# Allegro board standard2.brd
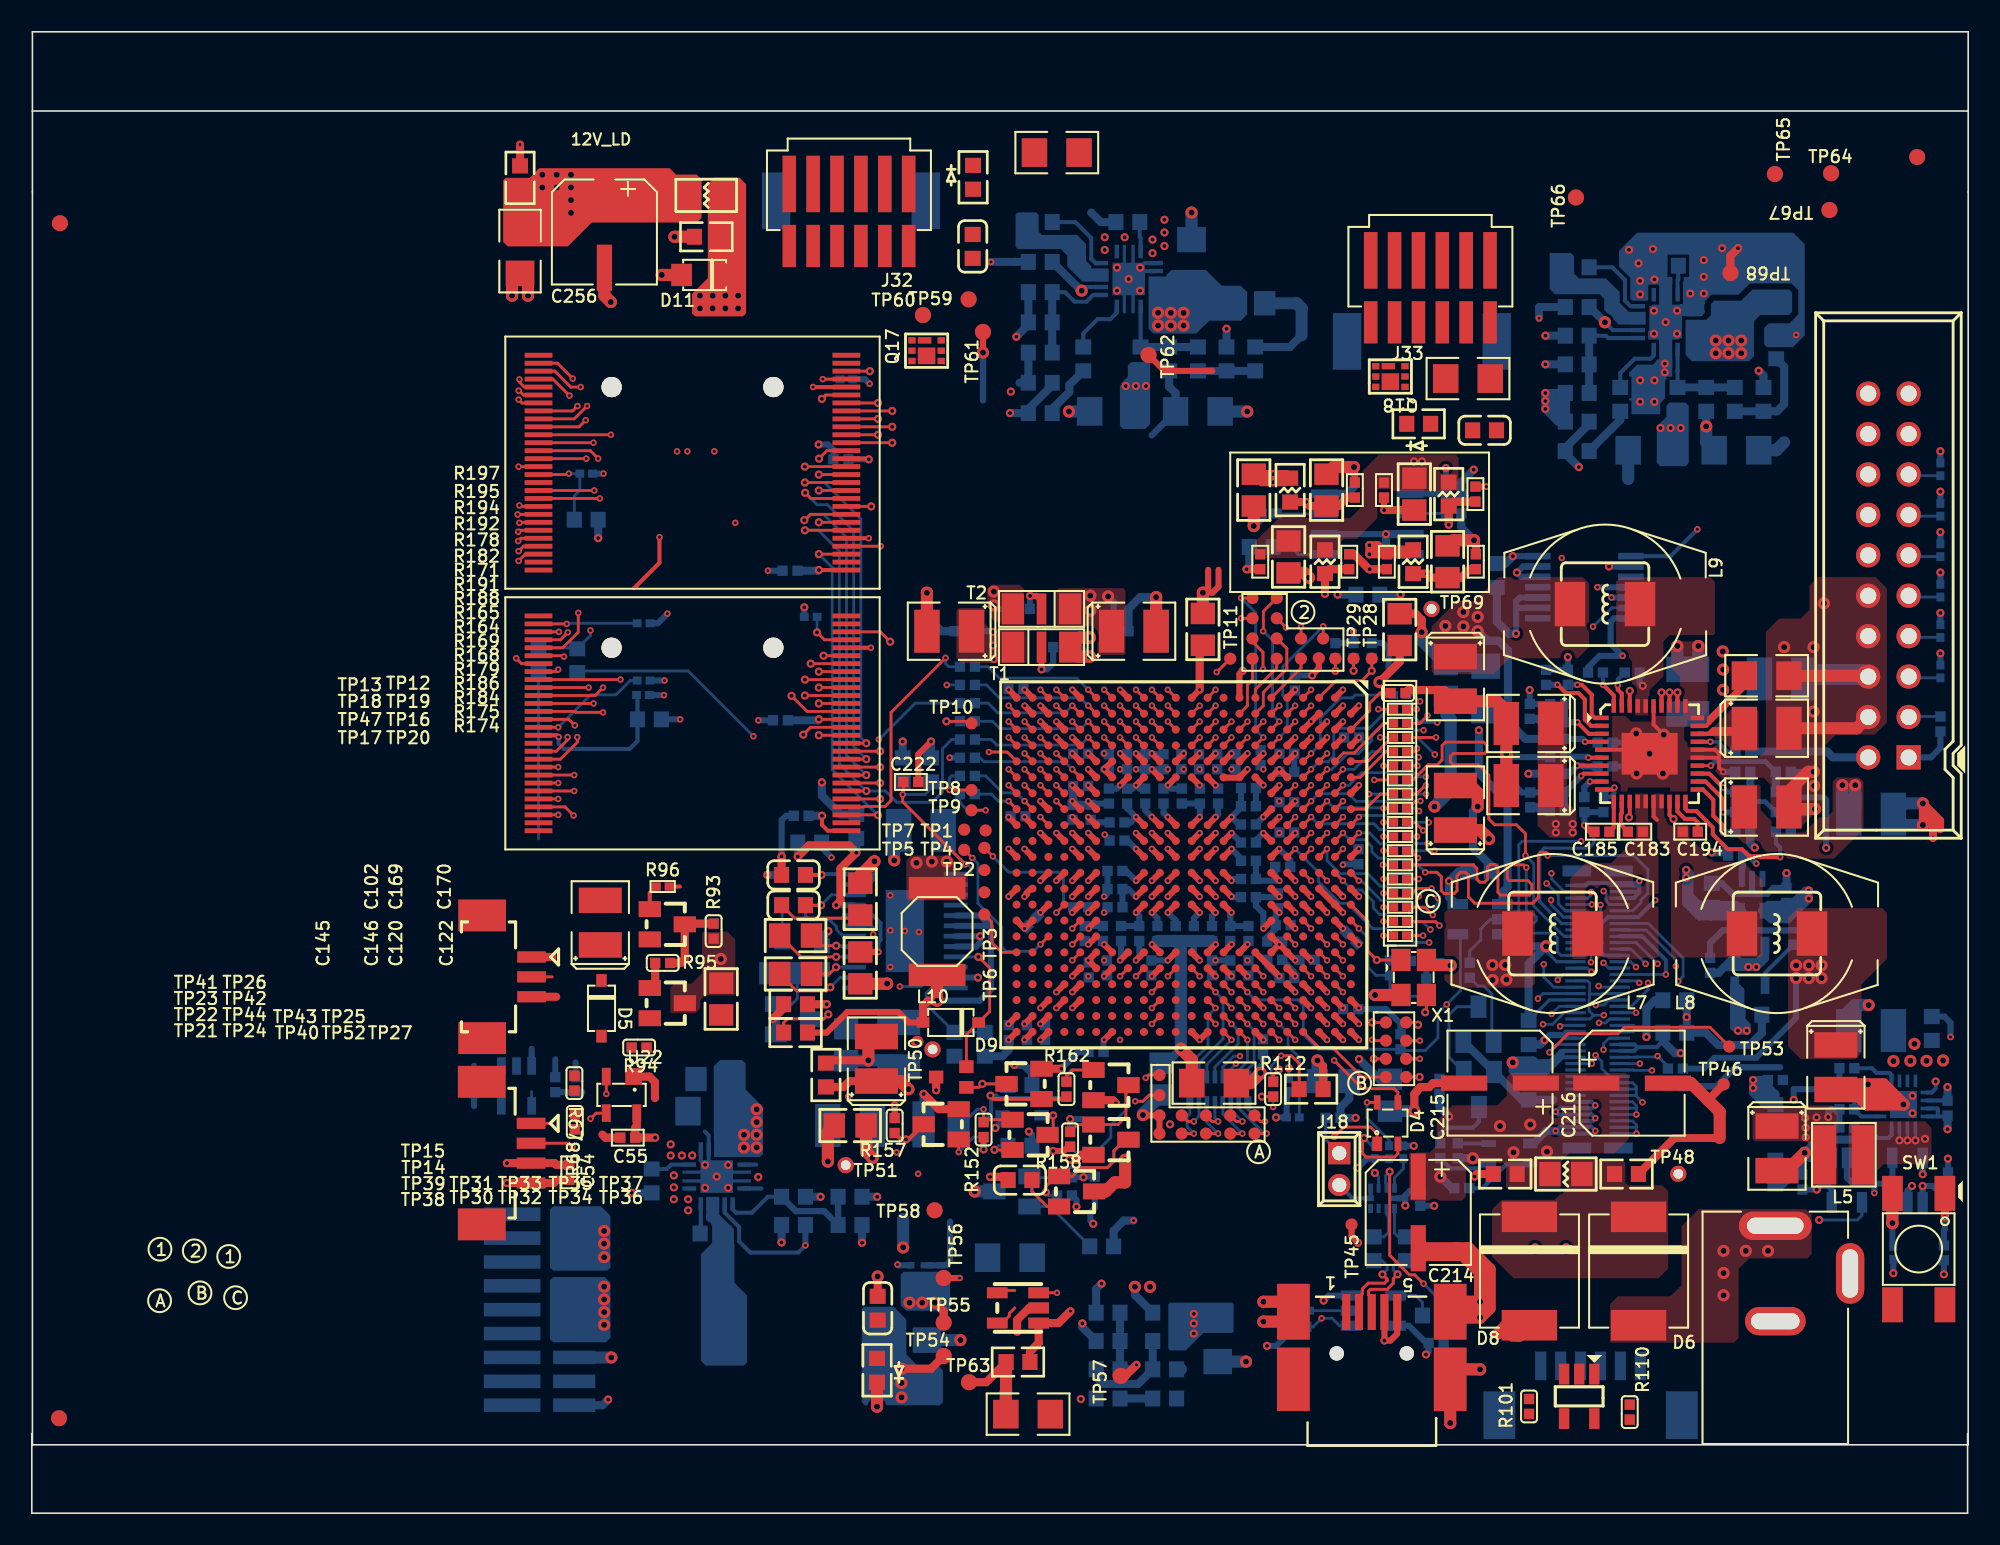
[diagram p0: board, top side]
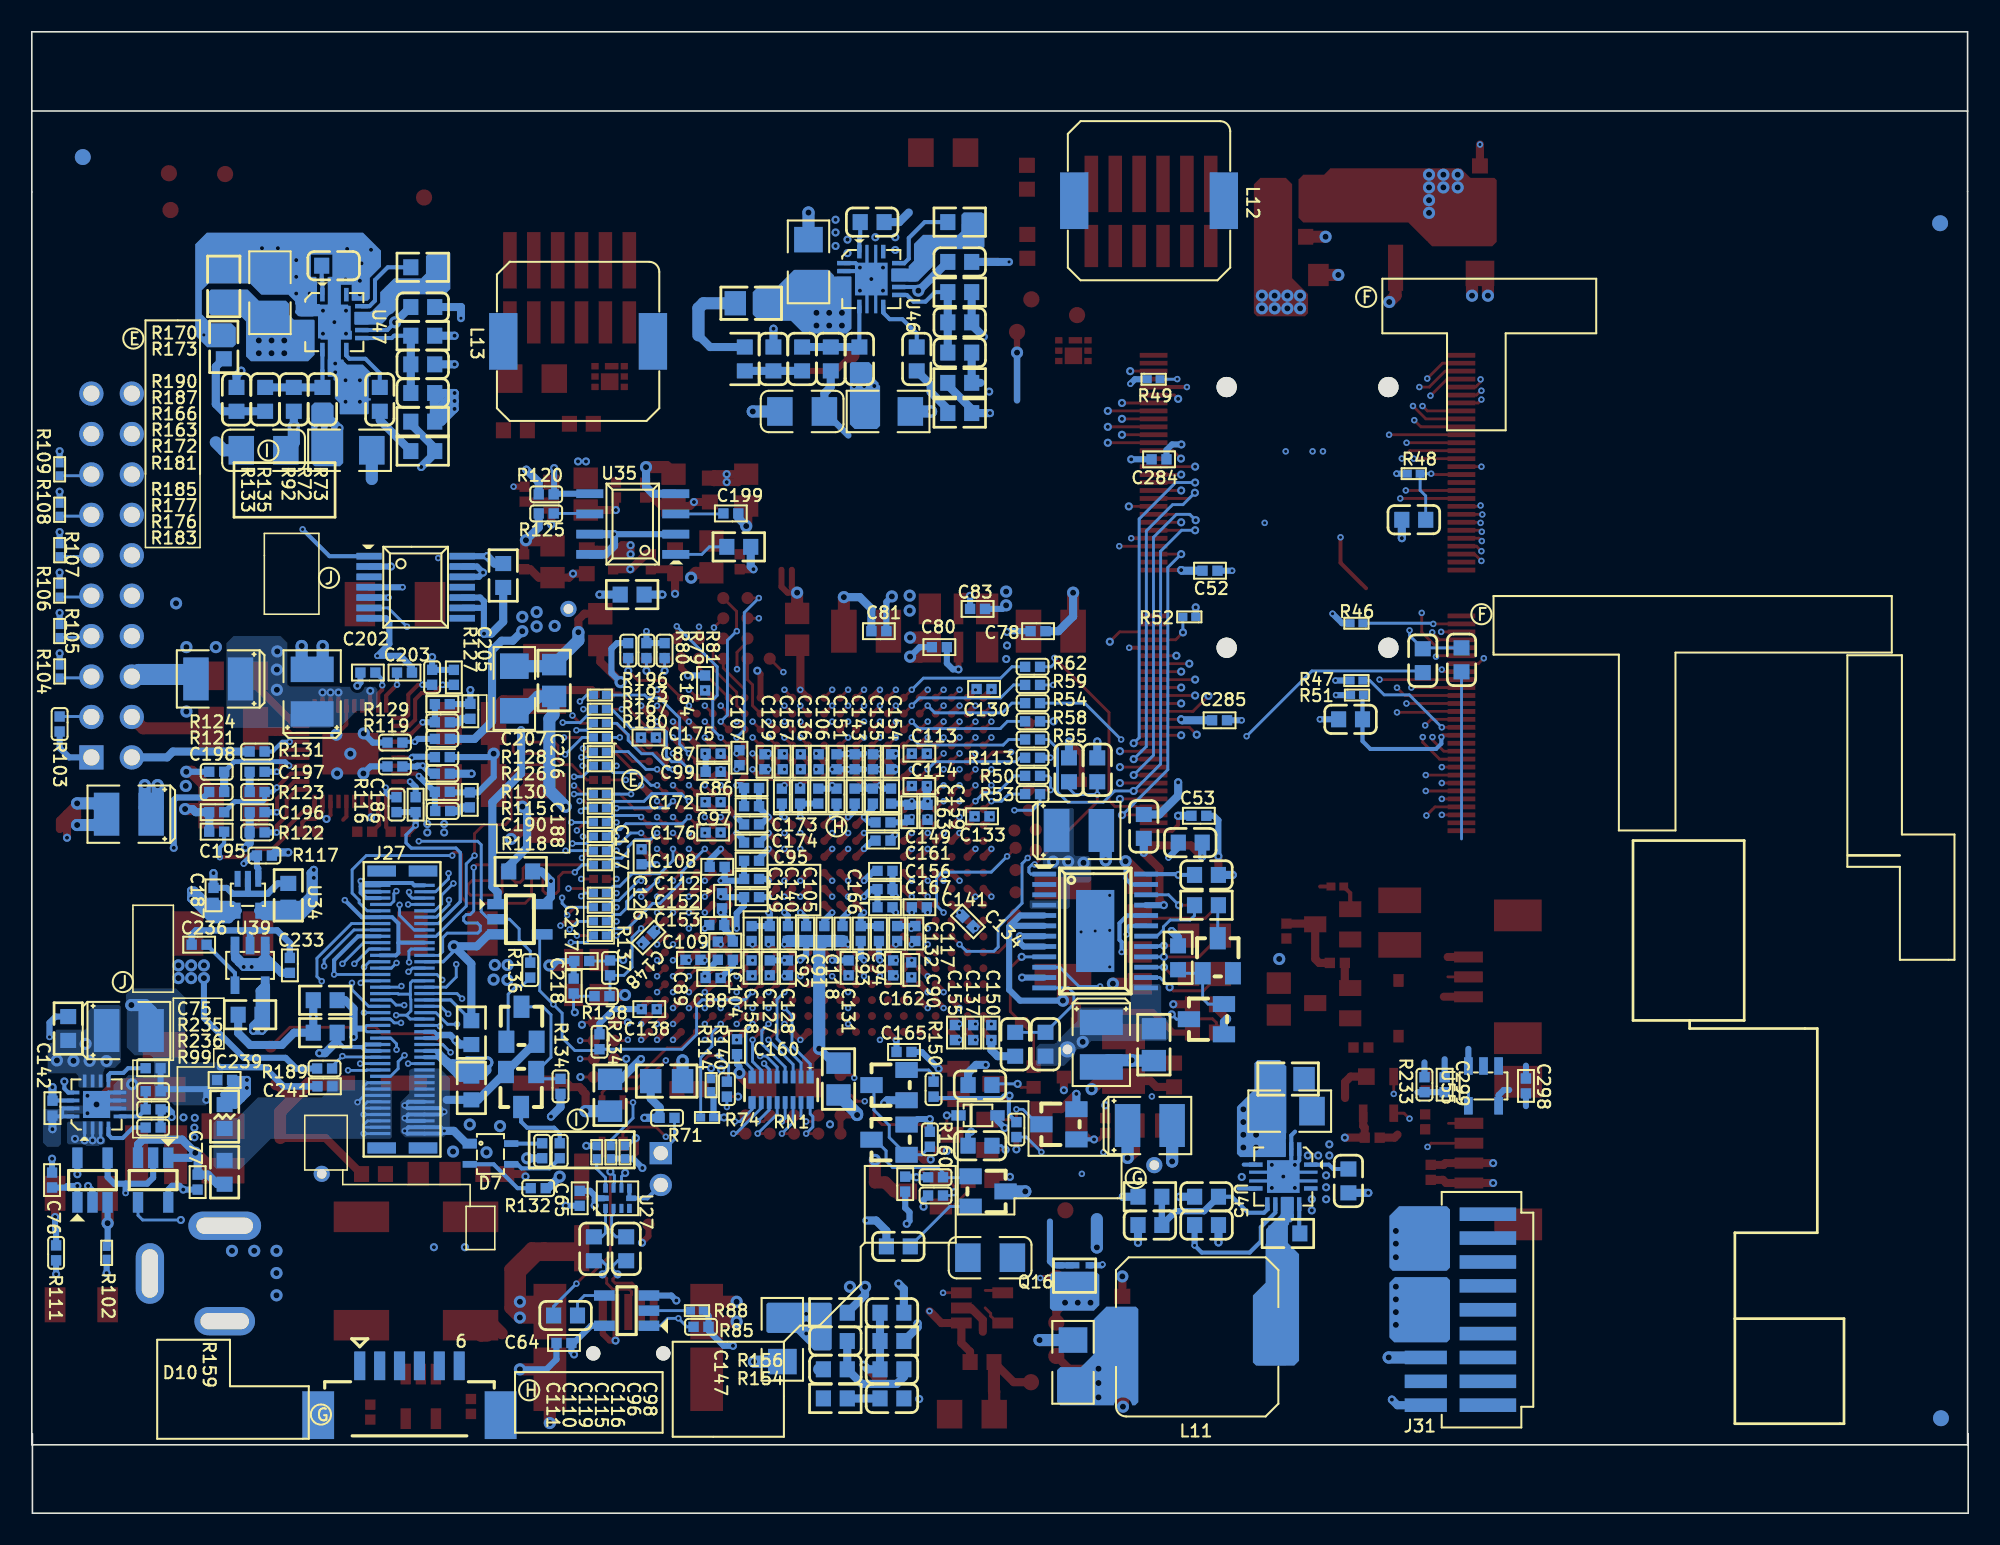
[diagram p1: board, bottom side, seen from below]

Outline 121.64 x 93.09 mm; copper layers: TOP, 2-GND, 3-SIG, 4--SIG, 5-VCC, 6-SIG, 7-VCC, BOTTOM. Coordinates in mm from the lower left corner of the outline.
Outline path: 0,5 0,0 121.6,0 121.6,5 ; 0.04,88.09 0.04,93.09 121.64,93.09 121.64,88.09

## Design rules (mm)
net group DIFF: nets USB_DAT_N USB_DAT_P
net group DIFFPAIR0: nets USB_DAT_NS USB_DAT_PS
net group DIFFPAIR2: nets RX_DATA0N RX_DATA0P
net group DIFFPAIR4: nets RX_DATA2N RX_DATA2P
net group DIFFPAIR5: nets DAT_N DAT_P
net group DIFFPAIR6: nets SYS_USB_DN SYS_USB_DP
net group P1_: nets P1_FIELD P2_CLK
net group 20: nets P3_CLK XTAL_IN XTAL_OUT
net group A2: nets A2 DVR0 P1_A2
net group A3: nets A3 DVR1 P1_A3
net group A4: nets A4 DVR2 P1_A4
net group A5: nets A5 DVR3 P1_A5
net group A6: nets A6 DVR4 P1_A6
net group A7: nets A7 DVR5 P1_A7
net group A8: nets A8 DVR6 P1_A8
net group A9: nets A9 DVR7 P1_A9
net group B2: nets B2 DVG0 P1_B2
net group B3: nets B3 DVG1 P1_B3
net group B4: nets B4 DVG2 P1_B4
net group B5: nets B5 DVG3 P1_B5
net group B6: nets B6 DVG4 P1_B6
net group B7: nets B7 DVG5 P1_B7
net group B8: nets B8 DVG6 P1_B8
net group B9: nets B9 DVG7 P1_B9
net group C2: nets C2 DVB0 P1_C2
net group C3: nets C3 DVB1 P1_C3
net group C4: nets C4 DVB2 P1_C4
net group C5: nets C5 DVB3 P1_C5
net group C6: nets C6 DVB4 P1_C6
net group C7: nets C7 DVB5 P1_C7
net group C8: nets C8 DVB6 P1_C8
net group C9: nets C9 DVB7 P1_C9
net group CLK: nets SSP0_CLK
net group D: nets DMD_D00 DMD_D01 DMD_D03 DMD_D04 DMD_D05 DMD_D07 DMD_D08 DMD_D11 DMD_D12 DMD_D13 DMD_D15 DMD_D16 DMD_D17 DMD_D20 DMD_D21 DMD_D22 DMD_D23 DMD_DAD_BUS DMD_DAD_OEZ DMD_DAD_STRB DMD_LOADB DMD_SAC_BUS DMD_SAC_CLK DMD_SCTRL DMD_TRC
net group DMD: nets D_D02 D_D06 D_D09 D_D10 D_D14 D_D18 D_D19 D_DCLK
net group DMD_D00: nets D_D00
net group DMD_D01: nets D_D01
net group DMD_D02: nets DMD_D02
net group DMD_D03: nets D_D03
net group DMD_D04: nets D_D04
net group DMD_D05: nets D_D05
net group DMD_D06: nets DMD_D06
net group DMD_D07: nets D_D07
net group DMD_D08: nets D_D08
net group DMD_D09: nets DMD_D09
net group DMD_D10: nets DMD_D10
net group DMD_D11: nets D_D11
net group DMD_D12: nets D_D12
net group DMD_D13: nets D_D13
net group DMD_D14: nets DMD_D14
net group DMD_D15: nets D_D15
net group DMD_D16: nets D_D16
net group DMD_D17: nets D_D17
net group DMD_D18: nets DMD_D18
net group DMD_D19: nets DMD_D19
net group DMD_D20: nets D_D20
net group DMD_D21: nets D_D21
net group DMD_D22: nets D_D22
net group DMD_D23: nets D_D23
net group DMD_DAD_BUS: nets D_BUS
net group DMD_DAD_OEZ: nets D_OEZ
net group DMD_DAD_STRB: nets D_STRB
net group DMD_DCLK: nets DMD_DCLK
net group DMD_LOADB: nets D_LOADB
net group DMD_SAC_BUS: nets D_SACBUS
net group DMD_SAC_CLK: nets D_SACCLK
net group DMD_SCTRL: nets D_SCTRL
net group DMD_TRC: nets D_TRC
net group DVCLK: nets DVCLK MOC MUX_PCLK
net group DVDE: nets DVDE MDE MUX_DATAEN
net group DVHS: nets DVHS MHS MUX_HSYNC
net group DVVS: nets DVVS MUX_VSYNC MVS
net group PM_: nets PM_BLS0 PM_BLS0S PM_BLS1 PM_BLS1S PM_OEZ PM_SRAM_CSSZ PM_SRAM_CSZ PM_WEZ
net group PWR_PH: nets A1P8V_PLLD A1P8V_PLLM EXT_1V8 P1P2V_PLLD P1P2V_PLLM P1P8V_LED P1P8V_TIN P1P8V_TOUT P2P5V
net group SYS-M: nets SYS_DATA00 SYS_DATA01 SYS_DATA02 SYS_DATA03 SYS_DATA04 SYS_DATA05 SYS_DATA06 SYS_DATA07 SYS_DATA08 SYS_DATA09 SYS_DATA10 SYS_DATA11 SYS_DATA12 SYS_DATA13 SYS_DATA14 SYS_DATA15 SYS_DATA16 SYS_DATA17 SYS_DATA18 SYS_DATA19 SYS_DATA20 SYS_DATA21 SYS_DATA22 SYS_DATA23 SYS_DATA_EN SYS_HSYNC SYS_PCLK SYS_VSYNC
net group TRACEPT: nets TRACEPKT0 TRACEPKT1 TRACEPKT2 TRACEPKT3 TRACEPKT6 TRACEPKT7

## Placement (name value [footprint] x y rotation side)
C52  0.1 uF  [CAP_0402]  47.63 59.22 0 bottom
C53  0.1 uF  [CAP_0402]  48.33 43.82 0 bottom
C54  0.1 uF  [CAP_0402]  33.76 21.42 90 top
C55  0.1 uF  [CAP_0402]  37.44 23.6 0 top
C64  0.1 uF  [CAP_0402]  88.21 10.69 180 bottom
C65  0.1uF  [CAP_0402]  87.22 19.79 270 bottom
C66  1 uF  [CAP_0805]  43.3 32.31 90 top
C67  22 uF  [CAP_1210]  35.71 37.11 270 top
C70  10 uF  [CAP_1210]  115.54 30.33 180 bottom
C71  22 uF  [CAP_1210]  109.63 22.92 90 top
C74  0.1 uF  [CAP_0603]  119.35 30.46 270 bottom
C75  3.3 nF  [CAP_0402]  114.02 27.96 0 bottom
C76  0.1 uF  [CAP_0402]  120.37 20.93 90 bottom
C77  0.1 uF  [CAP_0402]  111.22 20.8 270 bottom
C78  0.1 uF  [CAP_0402]  58.43 55.42 180 bottom
C79  22 uF  [CAP_1210]  57.63 55.42 0 top
C80  10 nF  [CAP_0402]  64.63 54.42 180 bottom
C81  0.1 uF  [CAP_0402]  68.43 55.42 0 bottom
C82  22 uF  [CAP_1210]  69.23 55.42 180 top
C83  10 nF  [CAP_0402]  62.23 56.82 0 bottom
C84  10 uF  [CAP_0805]  85.32 26.26 270 bottom
C85  10 uF  [CAP_0805]  70.96 27.28 270 bottom
C86  0.1 uF  [CAP_0402]  76.43 45.57 180 bottom
C87  0.1 uF  [CAP_0402]  78.84 47.73 0 bottom
C88  0.1 uF  [CAP_0402]  78.84 33.63 0 bottom
C89  0.1 uF  [CAP_0402]  80.11 34.77 0 bottom
C90  0.1 uF  [CAP_0402]  66.39 34.14 270 bottom
C91  0.1 uF  [CAP_0402]  71.85 36.42 90 bottom
C92  0.1 uF  [CAP_0402]  73 36.42 90 bottom
C93  0.1 uF  [CAP_0402]  69.57 36.42 90 bottom
C94  0.1 uF  [CAP_0402]  68.42 36.42 90 bottom
C95  0.1 uF  [CAP_0402]  76.43 41 180 bottom
C96  0.1 uF  [CAP_0402]  68.81 45.06 270 bottom
C97  0.1 uF  [CAP_0402]  76.43 44.43 180 bottom
C98  0.1 uF  [CAP_0402]  67.66 45.06 270 bottom
C99  0.1 uF  [CAP_0402]  78.84 46.58 0 bottom
C100  10 uF  [CAP_0805]  76.76 64.29 270 top
C101  10 uF  [CAP_0805]  81.33 64.29 90 top
C102  0.001 uF  [CAP_0402]  83.11 64.29 270 top
C103  100 uF  [CAP_1206]  74.27 27.03 0 top
C104  0.1 uF  [CAP_0402]  78.08 34.77 0 bottom
C105  0.1 uF  [CAP_0402]  74.14 36.42 90 bottom
C106  0.1 uF  [CAP_0402]  72.21 47.22 270 bottom
C107  0.1 uF  [CAP_0402]  77.19 47.47 270 bottom
C108  0.1 uF  [CAP_0402]  78.58 40.62 0 bottom
C109  0.1 uF  [CAP_0402]  78.08 35.92 180 bottom
C110  0.1 uF  [CAP_0402]  73.38 45.06 270 bottom
C111  0.1 uF  [CAP_0402]  74.52 45.06 270 bottom
C112  0.1 uF  [CAP_0402]  76.43 39.85 180 bottom
C113  0.1 uF  [CAP_0402]  65.88 47.73 180 bottom
C114  0.1 uF  [CAP_0402]  65.88 45.7 180 bottom
C115  0.1 uF  [CAP_0402]  71.09 45.06 270 bottom
C116  0.1 uF  [CAP_0402]  69.95 45.06 270 bottom
C117  0.1 uF  [CAP_0402]  66.14 36.42 90 bottom
C118  0.1 uF  [CAP_0402]  70.71 36.42 90 bottom
C119  0.1 uF  [CAP_0402]  72.23 45.06 270 bottom
C120  0.1 uF  [CAP_0402]  85.12 59.79 270 top
C121  10 uF  [CAP_0805]  88.93 59.79 90 top
C122  0.001 uF  [CAP_0402]  90.71 59.79 270 top
C123  10 uF  [CAP_0805]  81.76 27.15 180 bottom
C124  10 uF  [CAP_0805]  85.93 55.52 90 top
C125  10 uF  [CAP_0805]  73.56 55.54 90 top
C126  0.1 uF  [CAP_0402]  78.28 38.48 270 bottom
C127  0.1 uF  [CAP_0402]  75.28 34.27 90 bottom
C128  0.1 uF  [CAP_0402]  74.14 34.27 90 bottom
C129  0.1 uF  [CAP_0402]  75.61 47.22 270 bottom
C130  0.1 uF  [CAP_0402]  61.82 51.79 0 bottom
C131  0.1 uF  [CAP_0402]  70.33 34.27 90 bottom
C132  0.1 uF  [CAP_0402]  67.28 36.42 90 bottom
C133  0.1 uF  [CAP_0402]  61.95 43.79 0 bottom
C134  0.1 uF  [CAP_0402]  62.84 37.19 45 bottom
C135  0.1 uF  [CAP_0402]  68.81 47.22 270 bottom
C136  0.1 uF  [CAP_0402]  73.33 47.22 270 bottom
C137  0.1 uF  [CAP_0402]  62.51 30.2 90 bottom
C138  0.1 uF  [CAP_0402]  82.85 31.67 180 bottom
C139  0.1 uF  [CAP_0402]  76.43 36.42 90 bottom
C140  0.1 uF  [CAP_0402]  75.28 36.42 90 bottom
C141  0.1 uF  [CAP_0402]  65.88 38.08 180 bottom
C142  0.1 uF  [CAP_0402]  120.34 25.45 270 bottom
C143  0.1 uF  [CAP_0402]  69.95 47.22 270 bottom
C144  10 uF  [CAP_0805]  78.95 60.09 270 top
C145  0.1 uF  [CAP_0402]  77.17 59.79 270 top
C146  0.1 uF  [CAP_0402]  82.76 59.79 90 top
C147  0.1 uF  [CAP_0402]  66.77 20.68 90 bottom
C148  0.1 uF  [CAP_0402]  82.9 36.17 135 bottom
C149  0.1 uF  [CAP_0402]  68.17 43.41 0 bottom
C150  0.1 uF  [CAP_0402]  61.36 30.2 270 bottom
C151  0.1 uF  [CAP_0402]  71.09 47.22 270 bottom
C152  0.1 uF  [CAP_0402]  76.43 38.71 180 bottom
C153  0.1 uF  [CAP_0402]  78.61 36.96 180 bottom
C154  0.1 uF  [CAP_0402]  67.66 47.22 90 bottom
C155  0.1 uF  [CAP_0402]  63.65 30.2 90 bottom
C156  0.1 uF  [CAP_0402]  68.04 40.36 0 bottom
C157  0.1 uF  [CAP_0402]  74.47 47.22 270 bottom
C158  0.1 uF  [CAP_0402]  76.43 34.27 90 bottom
C159  0.1 uF  [CAP_0402]  65.38 44.04 90 bottom
C160  0.1 uF  [CAP_0402]  77.34 29.31 270 bottom
C161  0.1 uF  [CAP_0402]  68.17 42.27 0 bottom
C162  0.1 uF  [CAP_0402]  67.54 34.27 90 bottom
C163  0.1 uF  [CAP_0402]  66.52 44.04 90 bottom
C164  0.1 uF  [CAP_0402]  79.35 52.17 90 bottom
C165  0.1 uF  [CAP_0402]  66.85 28.98 180 bottom
C166  0.1 uF  [CAP_0402]  68.04 38.08 0 bottom
C167  0.1 uF  [CAP_0402]  68.04 39.22 0 bottom
C168  10 uF  [CAP_0805]  86.85 64.04 270 top
C169  0.1 uF  [CAP_0402]  84.94 64.29 270 top
C170  0.1 uF  [CAP_0402]  90.68 64.04 90 top
C171  10 uF  [CAP_0805]  88.83 52.32 90 bottom
C172  0.1 uF  [CAP_0402]  78.84 44.68 180 bottom
C173  0.1 uF  [CAP_0402]  76.43 43.28 180 bottom
C174  0.1 uF  [CAP_0402]  76.43 42.14 180 bottom
C175  0.1 uF  [CAP_0402]  82.9 48.74 180 bottom
C176  0.1 uF  [CAP_0402]  78.84 42.77 180 bottom
C177  0.1 uF  [CAP_0402]  83.33 41.25 270 bottom
C178  100 uF  [CAP_1206]  91.33 51.82 90 bottom
C179  10 uF  [CAP_1210]  94.03 45.72 180 top
C180  10 uF  [CAP_1210]  109.93 52.42 0 bottom
C181  10 uF  [CAP_1210]  108.98 44.37 0 top
C182  10 uF  [CAP_1210]  115.54 43.92 0 bottom
C183  47 nF  [CAP_0402]  100.73 42.82 0 top
C184  22 uF  [CAP_1210]  89.43 44.32 270 top
C185  4.7 nF  [CAP_0402]  98.63 42.82 180 top
C186  4.7 nF  [CAP_0402]  97.53 44.52 270 bottom
C187  0.1 uF  [CAP_0402]  110.23 38.82 90 bottom
C188  4.7 nF  [CAP_0402]  94.13 44.82 270 bottom
C189  2.2 uF  [CAP_0603]  105.53 38.82 270 bottom
C190  100 pF  [CAP_0402]  95.85 45.33 0 bottom
C191  10 uF  [CAP_1210]  104.03 51.62 90 bottom
C192  22 uF  [CAP_1210]  113.33 28.02 90 top
C193  0.1 uF  [CAP_0603]  83.93 57.72 0 bottom
C194  47 nF  [CAP_0402]  104.18 42.82 180 top
C195  10 nF  [CAP_0402]  110.03 42.82 0 bottom
C196  4.7 nF  [CAP_0402]  107.48 44.05 0 bottom
C197  4.7 nF  [CAP_0402]  107.48 46.59 0 bottom
C198  100 pF  [CAP_0402]  110.02 44.05 180 bottom
C199  47 nF  [CAP_0402]  77.73 62.82 0 bottom
C200  0.1 uF  [CAP_0603]  77.23 60.72 0 bottom
C201  10 uF  [CAP_1210]  94.03 49.62 180 top
C202  47 nF  [CAP_0402]  100.53 52.82 0 bottom
C203  10 nF  [CAP_0402]  98.23 52.82 180 bottom
C204  22 uF  [CAP_1210]  89.43 52.42 90 top
C205  4.7 nF  [CAP_0402]  95.13 52.52 90 bottom
C206  4.7 nF  [CAP_0402]  94.09 50.39 270 bottom
C207  100 pF  [CAP_0402]  95.85 50.84 0 bottom
C208  0.1 uF  [CAP_0603]  90.93 40.32 180 bottom
C209  3.3 uF  [CAP_1206]  108.98 52.62 180 top
C210  10 uF  [CAP_1210]  108.98 49.32 0 top
C211  0.1 uF  [CAP_0603]  92.03 58.92 90 bottom
C212  0.1 uF  [CAP_0603]  100.17 21.31 180 top
C213  0.1 uF  [CAP_0603]  92.55 21.31 0 top
C214  100 uF  [CAP-FK-V-CASEE_PAN]  87.09 18.9 180 top
C215  100 uF  [CAP-FK-V-CASEE_PAN]  92.23 27.02 90 top
C216  100 uF  [CAP-FK-V-CASEE_PAN]  100.53 27.02 270 top
C217  10 pF  [CAP_0402]  87.09 34.7 0 bottom
C218  10 pF  [CAP_0402]  87.6 33.12 90 bottom
C219  0.01 uF  [CAP_0603]  80.36 26.65 180 top
C220  1 uF  [CAP_0603]  47.98 30.2 0 top
C221  10 uF  [CAP_1210]  55.85 42.9 0 bottom
C222  6.2 PF  [CAP_0402]  55.22 45.95 180 top
C223  22 uF  [CAP_1210]  53.06 28.55 270 top
C224  0.1 uF  [CAP_0603]  49.88 27.53 270 top
C225  1000PF  [CAP_0805]  52.04 38.58 270 top
C226  0.1 uF  [CAP_0805]  47.98 36.3 0 top
C227  1 uF  [CAP_0603]  47.85 38.2 180 bottom
C228  1 uF  [CAP_0603]  49.63 34.9 270 bottom
C229  0.1 uF  [CAP_0805]  47.98 33.88 0 top
C230  1 uF  [CAP_0603]  47.98 31.98 180 top
C231  10 uF  [CAP_1210]  51.41 24.36 0 bottom
C232  0.1 uF  [CAP_0805]  51.41 24.36 0 top
C233  0.1 uF  [CAP_0402]  105.43 34.42 270 bottom
C234  2.2 uF  [CAP_0603]  107.93 31.32 180 bottom
C235  0.22 uF  [CAP_0805]  52.04 34.27 270 top
C236  0.1 uF  [CAP_0402]  111.13 35.72 180 bottom
C237  10 uF  [CAP_1210]  54.45 29.44 270 bottom
C238  0.1 uF  [CAP_0805]  51.15 29.44 270 bottom
C239  0.1 uF  [CAP_0402]  109.53 27.22 180 bottom
C240  10 uF  [CAP_0603]  109.53 21.42 270 bottom
C241  0.1 uF  [CAP_0402]  103.23 26.82 180 bottom
C242  0.1 uF  [CAP_0603]  94.03 30.2 270 bottom
C243  0.1 uF  [CAP_0603]  103.21 30.19 180 bottom
C244  0.1 uF  [CAP_0603]  103.21 32.23 180 bottom
C245  0.1 uF  [CAP_0603]  94.03 26.72 90 bottom
C251  0.1 uF  [CAP_0603]  61.95 9.5 0 top
C252  10uF  [CAP_1206]  62.58 6.22 0 top
C253  0.1 uF  [CAP_0603]  42.37 80.21 0 top
C254  0.1 uF  [CAP_0603]  30.67 83.91 270 top
C255  10uF  [CAP_1206]  30.67 79.31 90 top
C256  100 uF  [CAP-FK-V-CASEE_PAN]  35.97 80.51 180 top
C257  0.1 uF  [CAP_0603]  42.73 17.58 180 bottom
C258  10uF  [CAP_1206]  42.62 25.26 0 bottom
C259  4.7uF  [CAP_0805]  42.72 27.28 180 bottom
C260  10uF  [CAP_1206]  56.23 9.48 270 bottom
C261  8.2n  [CAP_0603]  71.16 7.21 180 bottom
C262  NC_0.1 uF  [CAP_0603]  51.4 19.88 180 bottom
C263  0.33uF  [CAP_0603]  67.61 10.82 0 bottom
C264  0.1 uF  [CAP_0603]  71.16 12.6 0 bottom
C265  10uF  [CAP_1206]  74.49 10.92 90 bottom
C266  0.1 uF  [CAP_0603]  63.35 81.13 0 bottom
C267  10uF  [CAP_1206]  72.85 78.63 270 bottom
C268  4.7uF  [CAP_0805]  76.45 76.03 0 bottom
C269  10uF  [CAP_1206]  64.39 85.5 0 top
C270  8.2n  [CAP_0603]  63.35 69.13 0 bottom
C271  NC_0.1 uF  [CAP_0603]  63.35 76.73 0 bottom
C272  0.33uF  [CAP_0603]  76.85 72.53 270 bottom
C273  0.1 uF  [CAP_0603]  63.35 71.03 180 bottom
C274  10uF  [CAP_1206]  67.85 69.23 0 bottom
C275  0.1 uF  [CAP_0603]  97.08 78.29 0 bottom
C276  10uF  [CAP_1206]  106.68 76.69 270 bottom
C277  4.7uF  [CAP_0805]  109.58 77.09 90 bottom
C278  10uF  [CAP_1206]  90.22 71.3 0 top
C279  NC_0.1 uF  [CAP_0603]  97.08 73.99 0 bottom
C280  8.2n  [CAP_0603]  97.08 66.74 0 bottom
C281  0.33uF  [CAP_0603]  109.58 73.29 270 bottom
C282  0.1 uF  [CAP_0603]  97.08 68.59 180 bottom
C283  10uF  [CAP_1206]  101.68 66.79 0 bottom
C284  0.1 uF  [CAP_0402]  50.83 66.22 0 bottom
C285  0.1 uF  [CAP_0402]  47.03 49.82 0 bottom
C298  0.1uF  [CAP_0402]  27.78 26.85 90 bottom
C299  0.1uF  [CAP_0402]  32.88 26.92 90 bottom
D4  LNJ107W5PRW  [4-SMD_GULL_WING]  85.16 24.51 90 top
D5  STPS0560Z  [SOD_123]  35.79 31.73 90 top
D6  B520C-13-F  [DO-214AB_SMC]  100.94 15.22 270 top
D7  LNJ107W5PRW  [4-SMD_GULL_WING]  92.83 22.57 180 bottom
D8  SMCJ15CA  [DO-214AB_SMC]  94.08 15.22 270 top
D9  STPS0560Z  [SOD_123]  57.73 30.84 0 top
D10  MAZ80330HL  [SC-90_SOD-323F]  62.2 24.99 180 bottom
D11  SMF15A-GS08  [DO-219AB]  42.27 77.81 0 top
D12  CDBU0520  [D_0603]  53.1 8.98 270 top
D13  CDBU0520  [D_0603]  59.13 83.95 90 top
D14  CDBU0520  [D_0603]  87.12 68.45 180 top
DN1  BAT54SW  [SOT323AVX]  47.14 35.03 180 bottom
DN2  BAT54SW  [SOT323AVX]  47.85 31.04 90 bottom
FB1  MI0603J680R-10  [FLTR_0603]  79.05 64.29 270 top
FB2  MI0603J680R-10  [FLTR_0603]  86.77 59.79 270 top
FB3  MI0603J680R-10  [FLTR_0603]  81.23 59.79 270 top
FB4  MI0603J680R-10  [FLTR_0603]  89.01 64.04 270 top
FB5  HI0805R800R-10  [FLTR_0805]  96.36 21.31 180 top
FB6  MI0603J680R-10  [FLTR_0603]  109.53 24.92 270 bottom
FB7  HI0805R800R-10  [FLTR_0805]  42.37 82.81 180 top
J17  53261-0471  [CONN_4]  27.36 21.37 270 top
J18  -  [951102-8622-AR]  82.13 22.62 270 top
J21  1734035-2  [CONN_5_USB_MINI_B]  84.17 12.66 180 top
J22  53261-0371  [CONN_3]  27.39 31.83 270 top
J24  CON20A  [CON_10X2]  115.36 47.49 180 top
J25  53261-0671  [CONN_6]  97.91 5.26 180 bottom
J26  RAPC712X  [CONN_PWRJACK]  109.52 18.06 270 top
J27  -  [AXT580124]  97.11 23.85 90 bottom
J31  87438-0943  [HDR_1X9_MOLEX]  34.07 12.78 0 bottom
J32  87438-0643  [HDR_1X6_MOLEX]  51.33 79.63 270 top
J33  87438-0643  [HDR_1X6_MOLEX]  87.86 74.83 270 top
L5  2.2 uH  [XFL4020]  113.83 22.52 270 top
L7  4.7 uH  [SRR1005]  95.53 36.42 180 top
L8  4.7 uH  [SRR1005]  109.63 36.42 0 top
L9  4.7 uH  [SRR1005]  98.83 57.12 180 top
L10  22 uH  [DT1608A]  56.87 36.55 270 top
L11  3.3u  [MSS1048]  48.43 11.08 270 bottom
L12  3.3u  [MSS1048]  51.46 82.47 90 bottom
L13  3.3u  [MSS1048]  87.32 73.64 90 bottom
NOREF  -  [unnamed]  1.76 81.06 0 top
NOREF#2  -  [unnamed]  118.44 85.22 0 top
NOREF#3  -  [unnamed]  1.71 5.97 0 top
NOREF#4  -  [#2]  20.04 4.29 0 top
NOREF#5  -  [unnamed]  1.71 5.97 180 bottom
NOREF#6  -  [unnamed]  1.76 81.06 180 bottom
NOREF#7  -  [unnamed]  118.44 85.22 180 bottom
Q1  2N2222A  [SOT23AVXD]  39.92 32.05 270 top
Q2  2N2222A  [SOT23AVXD]  39.92 37 270 top
Q3  MMBT6427  [SOT23AVXD]  90.9 26.62 0 bottom
Q4  2N2222A  [SOT23AVXD]  90.88 30.72 180 bottom
Q5  DMP2160UW-7  [SOT323]  57.76 27.41 90 top
Q6  2N2907A  [SOT23-3_FC]  67.79 26.9 90 bottom
Q7  FDV303N  [SPT23AVXD]  62.33 26.98 90 top
Q8  2N2907A  [SOT23-3_FC]  62.71 23.77 270 top
Q9  2N2222A  [SOT23AVXD]  61.57 20.22 270 bottom
Q10  2N2907A  [SOT23-3_FC]  65.63 20.22 270 top
Q11  2N2222A  [SOT23AVXD]  57.12 24.44 90 bottom
Q12  2N2222A  [SOT23AVXD]  67.79 23.47 90 bottom
Q13  2N2222A  [SOT23AVXD]  67.79 23.47 270 top
Q14  2N2222A  [SOT23AVXD]  57.12 24.44 90 top
Q15  2N2222A  [SOT23AVXD]  67.79 26.9 270 top
Q16  N-NextFET Power MOSFET  [U_6_SON]  56.13 14.93 90 bottom
Q17  N-NextFET Power MOSFET  [U_6_SON]  56.21 73.05 90 top
Q18  N-NextFET Power MOSFET  [U_6_SON]  85.34 71.43 90 top
R46  10K  [RES_0201]  38.43 55.92 0 bottom
R47  10K  [RES_0201]  38.43 52.32 0 bottom
R48  10K  [RES_0201]  34.83 65.32 180 bottom
R49  10K  [RES_0201]  51.17 71.26 180 bottom
R50  33.2  [RES_0402]  58.77 46.33 0 bottom
R51  10K  [RES_0201]  38.39 51.41 180 bottom
R52  10K  [RES_0201]  48.93 56.32 0 bottom
R53  33.2  [RES_0402]  58.77 45.19 0 bottom
R54  33.2  [RES_0402]  58.77 50.9 0 bottom
R55  33.2  [RES_0402]  58.77 48.62 0 bottom
R56  0  [RES_0603]  34.83 62.42 0 bottom
R57  0  [RES_0603]  38.8 49.89 0 bottom
R58  33.2  [RES_0402]  58.77 49.76 0 bottom
R59  33.2  [RES_0402]  58.77 52.05 0 bottom
R62  33.2  [RES_0402]  58.77 53.19 0 bottom
R65  0  [RES_0603]  34.26 53.57 270 bottom
R66  0  [RES_0603]  31.83 53.62 270 bottom
R67  1K  [RES_0402]  34.08 27.03 270 top
R68  1K  [RES_0402]  34.11 24.59 270 top
R71  1K  [RES_0402]  81.73 24.84 0 bottom
R72  330  [RES_0201]  85.26 22.68 270 bottom
R73  330  [RES_0201]  84.38 22.68 270 bottom
R74  100K  [RES_0201]  79.22 24.87 180 bottom
R79  3.3K  [RES_0402]  83.03 54.2 90 bottom
R80  3.3K  [RES_0402]  84.17 54.2 90 bottom
R81  1K  [RES_0402]  81.89 54.2 90 bottom
R85  3.3K  [RES_0402]  79.6 11.71 180 bottom
R88  100K  [RES_0201]  79.85 12.73 0 bottom
R89  1.5K  [RES_0603]  88.11 12.42 180 bottom
R90  22  [RES_0603]  84.3 16.61 90 bottom
R91  22  [RES_0603]  86.33 16.61 90 bottom
R92  100K  [RES_0201]  86.15 22.68 90 bottom
R93  1.5K  [RES_0402]  42.83 36.58 270 top
R94  3.3K  [RES_0402]  38.15 29.26 0 top
R95  1.5K  [RES_0402]  39.63 34.58 180 top
R96  10K  [RES_0201]  39.63 39.38 180 top
R99  100K  [RES_0402]  114.02 24.23 180 bottom
R101  1K  [RES_0402]  94.05 6.71 270 top
R102  10K  [RES_0201]  116.94 16.36 90 bottom
R103  1K  [RES_0402]  119.89 49.59 270 bottom
R104  10K  [RES_0201]  119.89 52.89 270 bottom
R105  10K  [RES_0201]  119.89 55.43 270 bottom
R106  10K  [RES_0201]  119.89 57.97 270 bottom
R107  10K  [RES_0201]  119.89 60.51 270 bottom
R108  10K  [RES_0201]  119.89 63.05 270 bottom
R109  10K  [RES_0201]  119.89 65.59 270 bottom
R110  10K  [RES_0402]  100.38 6.35 90 top
R111  100  [RES_0402]  120.11 16.36 90 bottom
R112  33  [RES_0402]  77.97 26.65 90 top
R113  4.7K  [RES_0402]  58.77 47.47 0 bottom
R114  10K  [RES_0201]  78.97 26.9 270 bottom
R115  40.2K  [RES_0402]  95.85 46.47 180 bottom
R116  100K  [RES_0402]  98.73 44.52 90 bottom
R117  10K  [RES_0402]  107.03 41.32 0 bottom
R118  20K  [RES_0402]  95.83 44.12 180 bottom
R119  80.6K  [RES_0402]  98.83 46.92 180 bottom
R120  10K  [RES_0402]  89.33 64.02 180 bottom
R121  40.2K  [RES_0402]  110.02 45.32 0 bottom
R122  150K  [RES_0402]  107.48 42.78 180 bottom
R123  20K  [RES_0402]  107.48 45.32 0 bottom
R124  29.4K  [RES_0402]  110.02 46.59 180 bottom
R125  10K  [RES_0402]  89.33 62.82 0 bottom
R126  40.2K  [RES_0402]  95.85 48.66 180 bottom
R127  150K  [RES_0402]  96.49 52.53 270 bottom
R128  20K  [RES_0402]  95.85 49.7 180 bottom
R129  7.68K  [RES_0402]  98.83 48.42 180 bottom
R130  383K  [RES_0402]  95.85 47.51 0 bottom
R131  10K  [RES_0402]  107.48 47.86 180 bottom
R132  1K  [RES_0402]  89.83 20.42 0 bottom
R133  3.3K  [RES_0402]  89.58 22.77 90 bottom
R134  3.3K  [RES_0402]  88.43 26.82 90 bottom
R135  3.3K  [RES_0402]  88.48 22.77 90 bottom
R136  10K  [RES_0402]  90.33 34.12 270 bottom
R137  1M  [RES_0402]  85.32 34.27 270 bottom
R138  100  [RES_0402]  85.82 32.49 180 bottom
R140  1K  [RES_0402]  77.97 26.65 90 bottom
R141  0  [RES_0603]  47.85 40.11 0 bottom
R142  10K  [RES_0603]  47.85 40.11 180 top
R143  360K  [RES_0603]  56.49 46.71 270 bottom
R144  15K  [RES_0603]  47.85 38.2 0 top
R145  56.0K  [RES_0603]  54.71 46.71 270 bottom
R146  75K  [RES_0603]  48.87 42.14 180 bottom
R147  620K  [RES_0603]  51.79 43.16 90 bottom
R148  680K  [RES_0603]  57.96 29.46 90 bottom
R149  56.0K  [RES_0603]  59.86 29.46 90 bottom
R150  10K  [RES_0402]  65 26.65 90 bottom
R151  2.2K  [RES_0603]  62.07 26.9 180 bottom
R152  10K  [RES_0402]  59.79 24.11 90 top
R153  12  [RES_0603]  62.07 23.09 180 bottom
R154  10K  [RES_0402]  64.87 19.97 180 bottom
R155  12  [RES_0603]  62.07 20.93 0 top
R156  3.3K  [RES_0402]  64.87 21.11 180 bottom
R157  3.3K  [RES_0402]  54.2 24.36 270 top
R158  2.2K  [RES_0402]  65.22 23.5 90 top
R159  10K  [RES_0402]  59.79 24.11 270 bottom
R160  33K  [RES_0402]  65.22 23.5 90 bottom
R161  12  [RES_0603]  67.2 16.76 0 bottom
R162  10K  [RES_0402]  65 26.65 90 top
R163  5.1  [RES_0201]  85.95 42.52 180 bottom
R164  5.1  [RES_0201]  85.95 42.52 180 top
R165  5.1  [RES_0201]  85.95 43.41 180 top
R166  5.1  [RES_0201]  85.95 43.41 180 bottom
R167  5.1  [RES_0201]  85.95 49.63 180 bottom
R168  5.1  [RES_0201]  85.95 40.74 180 top
R169  5.1  [RES_0201]  85.95 41.63 180 top
R170  5.1  [RES_0201]  85.95 47.85 180 bottom
R171  5.1  [RES_0201]  85.95 46.08 180 top
R172  5.1  [RES_0201]  85.95 41.63 180 bottom
R173  5.1  [RES_0201]  85.95 46.97 180 bottom
R174  5.1  [RES_0201]  85.95 36.3 180 top
R175  5.1  [RES_0201]  85.95 37.19 180 top
R176  5.1  [RES_0201]  85.95 37.19 180 bottom
R177  5.1  [RES_0201]  85.95 38.08 180 bottom
R178  5.1  [RES_0201]  85.95 47.85 180 top
R179  5.1  [RES_0201]  85.95 39.85 180 top
R180  5.1  [RES_0201]  85.95 48.74 180 bottom
R181  5.1  [RES_0201]  85.95 40.74 180 bottom
R182  5.1  [RES_0201]  85.95 46.97 180 top
R183  5.1  [RES_0201]  85.95 36.3 180 bottom
R184  5.1  [RES_0201]  85.95 38.08 180 top
R185  5.1  [RES_0201]  85.95 38.96 180 bottom
R186  5.1  [RES_0201]  85.95 38.96 180 top
R187  5.1  [RES_0201]  85.95 44.3 180 bottom
R188  5.1  [RES_0201]  85.95 44.3 180 top
R189  30K  [RES_0402]  103.25 27.94 180 bottom
R190  5.1  [RES_0201]  85.95 45.19 180 bottom
R191  5.1  [RES_0201]  85.95 45.19 180 top
R192  20  [RES_0201]  85.95 48.74 180 top
R193  20  [RES_0201]  85.95 50.52 180 bottom
R194  20  [RES_0201]  85.95 49.63 180 top
R195  20  [RES_0201]  85.95 50.52 180 top
R196  20  [RES_0201]  85.95 51.41 180 bottom
R197  160  [RES_0402]  85.82 51.54 180 top
R200  56.2k  [RES_0603]  38.93 20.88 90 bottom
R201  1k  [RES_0603]  53.13 12.88 270 top
R202  NC_9.09k  [RES_0603]  51.4 18.11 0 bottom
R203  1k  [RES_0603]  67.61 7.21 0 bottom
R204  NC_ 1k  [RES_0603]  47.84 19.88 180 bottom
R205  1k  [RES_0603]  47.84 18.11 180 bottom
R206  1k  [RES_0603]  67.61 12.6 180 bottom
R207  28.7k  [RES_0603]  67.61 9.04 0 bottom
R208  1k  [RES_0603]  71.16 9.04 180 bottom
R209  3.48k  [RES_0603]  71.16 10.82 180 bottom
R210  20m  [RES_1206]  61.44 16.05 0 bottom
R211  56.2k  [RES_0603]  68.85 81.13 0 bottom
R212  1k  [RES_0603]  59.1 79.6 90 top
R213  NC_9.09k  [RES_0603]  63.35 72.93 180 bottom
R214  1k  [RES_0603]  66.05 72.53 270 bottom
R215  NC_1k  [RES_0603]  63.35 74.83 0 bottom
R216  1k  [RES_0603]  63.35 78.63 180 bottom
R217  1k  [RES_0603]  75.05 72.53 90 bottom
R218  28.7k  [RES_0603]  73.25 72.53 270 bottom
R219  1k  [RES_0603]  71.45 72.53 90 bottom
R220  3.48k  [RES_0603]  69.65 72.53 90 bottom
R221  20m  [RES_1206]  73.25 69.23 180 bottom
R222  56.2k  [RES_0603]  102.68 78.39 0 bottom
R223  1k  [RES_0603]  91.26 68.05 180 top
R224  NC_9.09k  [RES_0603]  97.08 70.39 180 bottom
R225  1k  [RES_0603]  99.78 69.99 270 bottom
R226  NC_1k  [RES_0603]  97.08 72.19 0 bottom
R227  1k  [RES_0603]  97.08 75.79 180 bottom
R228  1k  [RES_0603]  108.78 69.99 90 bottom
R229  28.7k  [RES_0603]  106.98 69.99 270 bottom
R230  1k  [RES_0603]  105.18 69.99 90 bottom
R231  3.48k  [RES_0603]  103.38 69.99 90 bottom
R232  20m  [RES_1206]  107.08 66.79 180 bottom
R233  10K  [RES_0402]  34.15 26.92 270 bottom
R234  10K  [RES_0402]  85.98 29.62 270 bottom
R235  240K  [RES_0402]  114.02 26.52 0 bottom
R236  750K  [RES_0402]  114.02 25.38 180 bottom
RN1  33  [RPACK_16]  72.74 27.41 0 bottom
SW1  SW SPST  [SW_GT12]  118.53 16.6 270 top
T1  ACH3218  [FILTER_1210]  63.43 54.42 0 top
T2  ACH3218  [FILTER_1210]  63.43 56.82 180 top
TP1  Testpoint  [TP]  59.92 42.9 0 top
TP2  Testpoint  [TP]  59.84 40.41 0 top
TP3  Testpoint  [TP]  59.84 39.02 0 top
TP4  Testpoint  [TP]  59.84 41.81 0 top
TP5  Testpoint  [TP]  58.57 41.68 0 top
TP6  Testpoint  [TP]  59.84 37.62 0 top
TP7  Testpoint  [TP]  58.57 42.95 0 top
TP8  Testpoint  [TP]  59.03 45.44 0 top
TP9  Testpoint  [TP]  59.03 44.17 0 top
TP10  Testpoint  [TP]  59.03 49.63 0 top
TP11  Testpoint  [TP]  75.28 53.7 90 top
TP12  Testpoint  [TP]  86.33 30.84 90 top
TP13  Testpoint  [TP]  85.06 30.84 90 top
TP14  Testpoint  [TP]  70.84 26.26 90 top
TP15  Testpoint  [TP]  70.84 27.53 90 top
TP16  Testpoint  [TP]  86.33 28.55 90 top
TP17  Testpoint  [TP]  85.06 27.41 90 top
TP18  Testpoint  [TP]  85.06 29.69 90 top
TP19  Testpoint  [TP]  86.33 29.69 90 top
TP20  Testpoint  [TP]  86.33 27.41 90 top
TP21  Testpoint  [TP]  76.68 53.7 90 top
TP22  Testpoint  [TP]  76.68 54.97 90 top
TP23  Testpoint  [TP]  76.68 56.24 90 top
TP24  Testpoint  [TP]  78.2 53.7 90 top
TP25  Testpoint  [TP]  81.12 54.97 0 top
TP26  Testpoint  [TP]  78.2 57.51 0 top
TP27  Testpoint  [TP]  81.89 53.7 0 top
TP28  Testpoint  [TP]  84.17 53.7 0 top
TP29  Testpoint  [TP]  83.03 53.7 0 top
TP30  Testpoint  [TP]  72.23 23.85 0 top
TP31  Testpoint  [TP]  72.23 24.99 0 top
TP32  Testpoint  [TP]  73.76 23.85 0 top
TP33  Testpoint  [TP]  73.76 24.99 0 top
TP34  Testpoint  [TP]  75.28 23.85 0 top
TP35  Testpoint  [TP]  75.28 24.99 0 top
TP36  Testpoint  [TP]  76.81 23.85 0 top
TP37  Testpoint  [TP]  76.81 24.99 0 top
TP38  Testpoint  [TP]  70.84 23.85 0 top
TP39  Testpoint  [TP]  70.84 24.99 0 top
TP40  Testpoint  [TP]  79.73 53.7 0 top
TP41  Testpoint  [TP]  76.68 57.51 0 top
TP42  Testpoint  [TP]  78.2 56.24 0 top
TP43  Testpoint  [TP]  79.73 54.97 0 top
TP44  Testpoint  [TP]  78.2 54.97 0 top
TP45  Testpoint  [TP]  82.9 18.14 90 top
TP46  Testpoint  [TP]  106.28 26.95 90 top
TP47  Testpoint  [TP]  85.06 28.55 90 top
TP48  Testpoint  [TP40_24]  103.43 21.32 90 top
TP50  Testpoint  [TP40_24]  56.58 29.14 90 top
TP51  Testpoint  [TP40_24]  51.13 21.87 90 top
TP52  Testpoint  [TP]  80.84 53.72 90 top
TP53  Testpoint  [TP]  106.63 29.32 90 top
TP54  TESTPIN  [TP40]  57.28 9.88 90 top
TP55  TESTPIN  [TP40]  57.28 11.98 90 top
TP56  TESTPIN  [TP40]  57.28 14.78 90 top
TP57  TESTPIN  [TP40]  68.39 8.62 90 top
TP58  TESTPIN  [TP40]  56.71 19.03 90 top
TP59  TESTPIN  [TP40]  58.85 76.28 90 top
TP60  TESTPIN  [TP40]  55.98 75.29 90 top
TP61  TESTPIN  [TP40]  59.75 74.23 180 top
TP62  TESTPIN  [TP40]  70.15 72.78 180 top
TP63  TESTPIN  [TP40]  58.87 8.23 90 top
TP64  TESTPIN  [TP40]  113.03 84.2 90 top
TP65  TESTPIN  [TP40]  109.5 84.15 90 top
TP66  TESTPIN  [TP40]  97 82.68 90 top
TP67  TESTPIN  [TP40]  112.92 81.89 180 top
TP68  TESTPIN  [TP40]  106.7 77.93 180 top
TP69  Testpoint  [TP40_24]  87.93 56.82 0 top
U7  DLPC350  [BGA_419]  72.36 40.74 270 top
U19  M29DW128GL70N  [TSOP-56]  41.5 66.02 0 top
U20  M29DW128GL70N  [TSOP-56]  41.5 49.63 0 top
U22  TPD2E001DZD  [SOP_4]  37.04 26.29 270 top
U26  SN74LVC1G125DBVR  [SOT23-DBV_TI]  84.27 12.73 0 bottom
U27  TS3USB221ARSER  [RSE]  84.85 19.79 180 bottom
U29  TLV62130RGT  [RGT]  117.57 25.68 90 bottom
U30  SN74LVC1G125DBVR  [SOT23-DBV_TI]  97.2 7.34 270 top
U31  TPS3838K33DBVT  [SOT23-DBV_TI]  117.83 20.93 90 bottom
U32  SN74LVC1G07DBVR  [SOT23-DBV_TI]  114.02 20.93 270 bottom
U33  TPS65251RHAR  [QFN_40]  101.63 47.72 0 top
U34  TPS79718DCKT  [TI_DCK]  108.06 38.86 270 bottom
U35  TL7712ACD  [8-SOIC]  83.89 62.16 0 bottom
U36  SN74AHC1G09DVB  [TI_DVB]  90.98 37.32 180 bottom
U37  SN74HC21PWR  [14-SOIC]  97.53 58.19 180 bottom
U38  TPS65145PWP  [SOIC24-PWP_TI]  54.84 36.58 180 bottom
U39  TPS73025DBV  [TI_DBV]  107.93 34.42 270 bottom
U44  MCP3021A5T-E/OT  [SOT23-5]  61.95 12.9 90 top
U45  TPS54620RGY  [RGY]  43.02 21.15 0 bottom
U46  TPS54620RGY  [RGY]  68.9 77.55 270 bottom
U47  TPS54620RGY  [RGY]  102.63 74.85 270 bottom
U55  SN74LVC1G17DBV  [TI_DBV]  30.45 26.85 270 bottom
X1  32.0 MHZ  [3_2MM_2_5MM]  86.81 33.66 270 top

## Library data of the parts
C52-C55 C64-C67 C70 C71 C74-C213 C217-C219 C221 C223 C224 C231 C233 C234 C236 C237 C239-C245 C251-C255 C257-C285 C298 C299 = CAP NP
C214-C216 C256 = CAP POL
C220 C222 C225-C230 C232 C235 C238 = CAP_NP_dsize
D4 D7 = DUAL_COLOR_LED
D5 D9 = DIODE_SCHOTTKY_dsize
D6 = DIODE_SCHOTTKY
D8 = DIODE_TVS
D10-D14 = DIODE ZENER
DN1 DN2 = BAT54SW
FB1-FB4 FB6 L5 L7-L13 = INDUCTOR
FB5 FB7 = FERRITE
J17 = CON4
J18 = HEADER_1X1
J21 = CON4_0
J22 = CON3
J24 = CON20A: Tolerance: X; User Part Number: X
J25 = CONN_6
J26 = CON_PWRJACK3_RAPC712: User Part Number: X; Tolerance: X
J27 = CONN SOCKET AXT580124
J31 = HDR_1X9_M
J32 J33 = HDR_1X6_M
Q1-Q4 Q9 Q11-Q15 = 2N2222A
Q5 = DMP2160UW
Q6 Q8 Q10 = 2N2907A
Q7 = FDV303N
Q16-Q18 = CSD16301Q2
R46-R49 R51 R52 R96 R102 R104-R109 R114 = 1KR2F
R50 R53-R59 R62 R65-R68 R71-R74 R79-R81 R85 R88-R95 R99 R101 R103 R110-R113 R115-R138 R140 R146 R189 R197 R233-R236 = R
R141-R143 R145 R147-R149 = RESISTOR_dsize
R144 = RES
R150-R162 = RESISTOR
R163-R188 R190 R191 = R: signal model: R_RES_0201_5.1_5.1_
R192-R196 = R: signal model: R_RES_0201_20_20_
R200 R211 R222 = RESISTOR_H_TOL_1
R201-R210 R212-R221 R223-R232 = RESISTOR_V_TOL_3
RN1 = RESISTOR DIP 8
SW1 = SW SPST_1
T1 T2 = ACH3218
TP1-TP48 TP50-TP53 TP69 = Testpoint
TP54-TP68 = TESTPIN
U7 = DLPC350
U19 U20 = M29DW128GL70N
U22 = TPD2E001
U26 U30 = 74LVC1G125
U27 = TS3USB221A
U29 = TLV62130
U31 = TPS3838
U32 = 74LVC1G07_0
U33 = TPS65251
U34 = TPS79718_1
U35 = TL7712A
U36 = SN74AHC1G09
U37 = SN74HC21
U38 = TPS65145_1
U39 = TPS73025
U44 = MCP3021
U45-U47 = TPS54620RGY
U55 = SN74LVC1G17DBV
X1 = CRYSTAL_0

## Footprints (pads in the part's own frame, mm; a bottom-side part is the same pattern mirrored in y, then rotated)
3_2MM_2_5MM
  rect 1.4x1.2 smd: 1(-1.1,-0.8) 2(1.1,-0.8) 3(1.1,0.8) 4(-1.1,0.8)
4-SMD_GULL_WING
  rect 0.9x0.62 smd: 1(-1.3,0.65)
  rect 0.9x0.42 smd: 2(1.3,0.65) 3(-1.3,-0.65) 4(1.3,-0.65)
8-SOIC
  rect 1.7x0.55 smd: 1(-2.7,1.905) 2(-2.7,0.635) 3(-2.7,-0.635) 4(-2.7,-1.905) 5(2.7,-1.905) 6(2.7,-0.635) 7(2.7,0.635) 8(2.7,1.905)
14-SOIC
  rect 1.6x0.42 smd: 1(-2.925,1.95) 2(-2.925,1.3) 3(-2.925,0.65) 4(-2.925,0) 5(-2.925,-0.65) 6(-2.925,-1.3) 7(-2.925,-1.95) 8(2.925,-1.95) 9(2.925,-1.3) 10(2.925,-0.65) 11(2.925,0) 12(2.925,0.65) 13(2.925,1.3) 14(2.925,1.95)
951102-8622-AR
  rect 1.4x1.4 hole 0.9: 1(0,0)
  round 1.4 hole 0.9: 2(2,0)
AXT580124
  rect 0.2x1.28 smd: M1(0,2.64) M2(0.4,2.64) M3(0.8,2.64) M4(1.2,2.64) M5(1.6,2.64) M6(2,2.64) M7(2.4,2.64) M8(2.8,2.64) M9(3.2,2.64) M10(3.6,2.64) M11(4,2.64) M12(4.4,2.64) M13(4.8,2.64) M14(5.2,2.64) M15(5.6,2.64) M16(6,2.64) M17(6.4,2.64) M18(6.8,2.64) M19(7.2,2.64) M20(7.6,2.64) M21(8,2.64) M22(8.4,2.64) M23(8.8,2.64) M24(9.2,2.64) M25(9.6,2.64) M26(10,2.64) M27(10.4,2.64) M28(10.8,2.64) M29(11.2,2.64) M30(11.6,2.64) M31(12,2.64) M32(12.4,2.64) M33(12.8,2.64) M34(13.2,2.64) M35(13.6,2.64) M36(14,2.64) M37(14.4,2.64) M38(14.8,2.64) M39(15.2,2.64) M40(15.6,2.64) P1(0,-0.14) P2(0.4,-0.14) P3(0.8,-0.14) P4(1.2,-0.14) P5(1.6,-0.14) P6(2,-0.14) P7(2.4,-0.14) P8(2.8,-0.14) P9(3.2,-0.14) P10(3.6,-0.14) P11(4,-0.14) P12(4.4,-0.14) P13(4.8,-0.14) P14(5.2,-0.14) P15(5.6,-0.14) P16(6,-0.14) P17(6.4,-0.14) P18(6.8,-0.14) P19(7.2,-0.14) P20(7.6,-0.14) P21(8,-0.14) P22(8.4,-0.14) P23(8.8,-0.14) P24(9.2,-0.14) P25(9.6,-0.14) P26(10,-0.14) P27(10.4,-0.14) P28(10.8,-0.14) P29(11.2,-0.14) P30(11.6,-0.14) P31(12,-0.14) P32(12.4,-0.14) P33(12.8,-0.14) P34(13.2,-0.14) P35(13.6,-0.14) P36(14,-0.14) P37(14.4,-0.14) P38(14.8,-0.14) P39(15.2,-0.14) P40(15.6,-0.14)
  rect 0.7x1.8 smd: Y1(-0.9,-0.05) Y2(16.5,-0.05) Z1(-0.9,2.55) Z2(16.5,2.55)
BGA_419
  round 0.5 smd: A2(-9.5,10.5) A3(-8.5,10.5) A4(-7.5,10.5) A5(-6.5,10.5) A6(-5.5,10.5) A7(-4.5,10.5) A8(-3.5,10.5) A9(-2.5,10.5) A10(-1.5,10.5) A11(-0.5,10.5) A12(0.5,10.5) A13(1.5,10.5) A14(2.5,10.5) A15(3.5,10.5) A16(4.5,10.5) A17(5.5,10.5) A18(6.5,10.5) A19(7.5,10.5) A20(8.5,10.5) A21(9.5,10.5) A22(10.5,10.5) AA1(-10.5,-9.5) AA2(-9.5,-9.5) AA3(-8.5,-9.5) AA4(-7.5,-9.5) AA5(-6.5,-9.5) AA6(-5.5,-9.5) AA7(-4.5,-9.5) AA8(-3.5,-9.5) AA9(-2.5,-9.5) AA10(-1.5,-9.5) AA11(-0.5,-9.5) AA12(0.5,-9.5) AA13(1.5,-9.5) AA14(2.5,-9.5) AA15(3.5,-9.5) AA16(4.5,-9.5) AA17(5.5,-9.5) AA18(6.5,-9.5) AA19(7.5,-9.5) AA20(8.5,-9.5) AA21(9.5,-9.5) AA22(10.5,-9.5) AB1(-10.5,-10.5) AB2(-9.5,-10.5) AB3(-8.5,-10.5) AB4(-7.5,-10.5) AB5(-6.5,-10.5) AB6(-5.5,-10.5) AB7(-4.5,-10.5) AB8(-3.5,-10.5) AB9(-2.5,-10.5) AB10(-1.5,-10.5) AB11(-0.5,-10.5) AB12(0.5,-10.5) AB13(1.5,-10.5) AB14(2.5,-10.5) AB15(3.5,-10.5) AB16(4.5,-10.5) AB17(5.5,-10.5) AB18(6.5,-10.5) AB19(7.5,-10.5) AB20(8.5,-10.5) AB21(9.5,-10.5) AB22(10.5,-10.5) B1(-10.5,9.5) B2(-9.5,9.5) B3(-8.5,9.5) B4(-7.5,9.5) B5(-6.5,9.5) B6(-5.5,9.5) B7(-4.5,9.5) B8(-3.5,9.5) B9(-2.5,9.5) B10(-1.5,9.5) B11(-0.5,9.5) B12(0.5,9.5) B13(1.5,9.5) B14(2.5,9.5) B15(3.5,9.5) B16(4.5,9.5) B17(5.5,9.5) B18(6.5,9.5) B19(7.5,9.5) B20(8.5,9.5) B21(9.5,9.5) B22(10.5,9.5) C1(-10.5,8.5) C2(-9.5,8.5) C3(-8.5,8.5) C4(-7.5,8.5) C5(-6.5,8.5) C6(-5.5,8.5) C7(-4.5,8.5) C8(-3.5,8.5) C9(-2.5,8.5) C10(-1.5,8.5) C11(-0.5,8.5) C12(0.5,8.5) C13(1.5,8.5) C14(2.5,8.5) C15(3.5,8.5) C16(4.5,8.5) C17(5.5,8.5) C18(6.5,8.5) C19(7.5,8.5) C20(8.5,8.5) C21(9.5,8.5) C22(10.5,8.5) D1(-10.5,7.5) D2(-9.5,7.5) D3(-8.5,7.5) D4(-7.5,7.5) D5(-6.5,7.5) D6(-5.5,7.5) D7(-4.5,7.5) D8(-3.5,7.5) D9(-2.5,7.5) D10(-1.5,7.5) D11(-0.5,7.5) D12(0.5,7.5) D13(1.5,7.5) D14(2.5,7.5) D15(3.5,7.5) D16(4.5,7.5) D17(5.5,7.5) D18(6.5,7.5) D19(7.5,7.5) D20(8.5,7.5) D21(9.5,7.5) D22(10.5,7.5) E1(-10.5,6.5) E2(-9.5,6.5) E3(-8.5,6.5) E4(-7.5,6.5) E5(-6.5,6.5) E6(-5.5,6.5) E7(-4.5,6.5) E8(-3.5,6.5) E9(-2.5,6.5) E10(-1.5,6.5) E11(-0.5,6.5) E12(0.5,6.5) E13(1.5,6.5) E14(2.5,6.5) E15(3.5,6.5) E16(4.5,6.5) E17(5.5,6.5) E18(6.5,6.5) E19(7.5,6.5) E20(8.5,6.5) E21(9.5,6.5) E22(10.5,6.5) F1(-10.5,5.5) F2(-9.5,5.5) F3(-8.5,5.5) F4(-7.5,5.5) F5(-6.5,5.5) F6(-5.5,5.5) F7(-4.5,5.5) F8(-3.5,5.5) F9(-2.5,5.5) F10(-1.5,5.5) F11(-0.5,5.5) F12(0.5,5.5) F13(1.5,5.5) F14(2.5,5.5) F15(3.5,5.5) F16(4.5,5.5) F17(5.5,5.5) F18(6.5,5.5) F19(7.5,5.5) F20(8.5,5.5) F21(9.5,5.5) F22(10.5,5.5) G1(-10.5,4.5) G2(-9.5,4.5) G3(-8.5,4.5) G4(-7.5,4.5) G5(-6.5,4.5) G6(-5.5,4.5) G17(5.5,4.5) G18(6.5,4.5) G19(7.5,4.5) G20(8.5,4.5) G21(9.5,4.5) G22(10.5,4.5) H1(-10.5,3.5) H2(-9.5,3.5) H3(-8.5,3.5) H4(-7.5,3.5) H5(-6.5,3.5) H6(-5.5,3.5) H17(5.5,3.5) H18(6.5,3.5) H19(7.5,3.5) H20(8.5,3.5) H21(9.5,3.5) H22(10.5,3.5) J1(-10.5,2.5) J2(-9.5,2.5) J3(-8.5,2.5) J4(-7.5,2.5) J5(-6.5,2.5) J6(-5.5,2.5) J9(-2.5,2.5) J10(-1.5,2.5) J11(-0.5,2.5) J12(0.5,2.5) J13(1.5,2.5) J14(2.5,2.5) J17(5.5,2.5) J18(6.5,2.5) J19(7.5,2.5) J20(8.5,2.5) J21(9.5,2.5) J22(10.5,2.5) K1(-10.5,1.5) K2(-9.5,1.5) K3(-8.5,1.5) K4(-7.5,1.5) K5(-6.5,1.5) K6(-5.5,1.5) K9(-2.5,1.5) K10(-1.5,1.5) K11(-0.5,1.5) K12(0.5,1.5) K13(1.5,1.5) K14(2.5,1.5) K17(5.5,1.5) K18(6.5,1.5) K19(7.5,1.5) K20(8.5,1.5) K21(9.5,1.5) K22(10.5,1.5) L1(-10.5,0.5) L2(-9.5,0.5) L3(-8.5,0.5) L4(-7.5,0.5) L5(-6.5,0.5) L6(-5.5,0.5) L9(-2.5,0.5) L10(-1.5,0.5) L11(-0.5,0.5) L12(0.5,0.5) L13(1.5,0.5) L14(2.5,0.5) L17(5.5,0.5) L18(6.5,0.5) L19(7.5,0.5) L20(8.5,0.5) L21(9.5,0.5) L22(10.5,0.5) M1(-10.5,-0.5) M2(-9.5,-0.5) M3(-8.5,-0.5) M4(-7.5,-0.5) M5(-6.5,-0.5) M6(-5.5,-0.5) M9(-2.5,-0.5) M10(-1.5,-0.5) M11(-0.5,-0.5) M12(0.5,-0.5) M13(1.5,-0.5) M14(2.5,-0.5) M17(5.5,-0.5) M18(6.5,-0.5) M19(7.5,-0.5) M20(8.5,-0.5) M21(9.5,-0.5) M22(10.5,-0.5) N1(-10.5,-1.5) N2(-9.5,-1.5) N3(-8.5,-1.5) N4(-7.5,-1.5) N5(-6.5,-1.5) N6(-5.5,-1.5) N9(-2.5,-1.5) N10(-1.5,-1.5) N11(-0.5,-1.5) N12(0.5,-1.5) N13(1.5,-1.5) N14(2.5,-1.5) N17(5.5,-1.5) N18(6.5,-1.5) N19(7.5,-1.5) N20(8.5,-1.5) N21(9.5,-1.5) N22(10.5,-1.5) P1(-10.5,-2.5) P2(-9.5,-2.5) P3(-8.5,-2.5) P4(-7.5,-2.5) P5(-6.5,-2.5) P6(-5.5,-2.5) P9(-2.5,-2.5) P10(-1.5,-2.5) P11(-0.5,-2.5) P12(0.5,-2.5) P13(1.5,-2.5) P14(2.5,-2.5) P17(5.5,-2.5) P18(6.5,-2.5) P19(7.5,-2.5) P20(8.5,-2.5) P21(9.5,-2.5) P22(10.5,-2.5) R1(-10.5,-3.5) R2(-9.5,-3.5) R3(-8.5,-3.5) R4(-7.5,-3.5) R5(-6.5,-3.5) R6(-5.5,-3.5) R17(5.5,-3.5) R18(6.5,-3.5) R19(7.5,-3.5) R20(8.5,-3.5) R21(9.5,-3.5) R22(10.5,-3.5) T1(-10.5,-4.5) T2(-9.5,-4.5) T3(-8.5,-4.5) T4(-7.5,-4.5) T5(-6.5,-4.5) T6(-5.5,-4.5) T17(5.5,-4.5) T18(6.5,-4.5) T19(7.5,-4.5) T20(8.5,-4.5) T21(9.5,-4.5) T22(10.5,-4.5) U1(-10.5,-5.5) U2(-9.5,-5.5) U3(-8.5,-5.5) U4(-7.5,-5.5) U5(-6.5,-5.5) U6(-5.5,-5.5) U7(-4.5,-5.5) U8(-3.5,-5.5) U9(-2.5,-5.5) U10(-1.5,-5.5) U11(-0.5,-5.5) U12(0.5,-5.5) U13(1.5,-5.5) U14(2.5,-5.5) U15(3.5,-5.5) U16(4.5,-5.5) U17(5.5,-5.5) U18(6.5,-5.5) U19(7.5,-5.5) U20(8.5,-5.5) U21(9.5,-5.5) U22(10.5,-5.5) V1(-10.5,-6.5) V2(-9.5,-6.5) V3(-8.5,-6.5) V4(-7.5,-6.5) V5(-6.5,-6.5) V6(-5.5,-6.5) V7(-4.5,-6.5) V8(-3.5,-6.5) V9(-2.5,-6.5) V10(-1.5,-6.5) V11(-0.5,-6.5) V12(0.5,-6.5) V13(1.5,-6.5) V14(2.5,-6.5) V15(3.5,-6.5) V16(4.5,-6.5) V17(5.5,-6.5) V18(6.5,-6.5) V19(7.5,-6.5) V20(8.5,-6.5) V21(9.5,-6.5) V22(10.5,-6.5) W1(-10.5,-7.5) W2(-9.5,-7.5) W3(-8.5,-7.5) W4(-7.5,-7.5) W5(-6.5,-7.5) W6(-5.5,-7.5) W7(-4.5,-7.5) W8(-3.5,-7.5) W9(-2.5,-7.5) W10(-1.5,-7.5) W11(-0.5,-7.5) W12(0.5,-7.5) W13(1.5,-7.5) W14(2.5,-7.5) W15(3.5,-7.5) W16(4.5,-7.5) W17(5.5,-7.5) W18(6.5,-7.5) W19(7.5,-7.5) W20(8.5,-7.5) W21(9.5,-7.5) W22(10.5,-7.5) Y1(-10.5,-8.5) Y2(-9.5,-8.5) Y3(-8.5,-8.5) Y4(-7.5,-8.5) Y5(-6.5,-8.5) Y6(-5.5,-8.5) Y7(-4.5,-8.5) Y8(-3.5,-8.5) Y9(-2.5,-8.5) Y10(-1.5,-8.5) Y11(-0.5,-8.5) Y12(0.5,-8.5) Y13(1.5,-8.5) Y14(2.5,-8.5) Y15(3.5,-8.5) Y16(4.5,-8.5) Y17(5.5,-8.5) Y18(6.5,-8.5) Y19(7.5,-8.5) Y20(8.5,-8.5) Y21(9.5,-8.5) Y22(10.5,-8.5)
CAP-FK-V-CASEE_PAN
  rect 0.95x2.9 smd: 1(0,-2.25) 2(0,2.25)
CAP_0402
  rect 0.65x0.65 smd: 1(-0.47,0) 2(0.47,0)
CAP_0603
  rect 0.95x1 smd: 1(-0.75,0) 2(0.75,0)
CAP_0805
  rect 1.346x1.524 smd: 1(-1,0) 2(1,0)
CAP_1206
  rect 1.6x1.8 smd: 1(-1.4,0) 2(1.4,0)
CAP_1210
  rect 1.6x2.7 smd: 1(-1.4,0) 2(1.4,0)
CON_10X2
  rect 1.524x1.524 hole 1.016: 1(-2.54,0)
  round 1.524 hole 1.016: 2(0,0) 3(-2.54,-2.54) 4(0,-2.54) 5(-2.54,-5.08) 6(0,-5.08) 7(-2.54,-7.62) 8(0,-7.62) 9(-2.54,-10.16) 10(0,-10.16) 11(-2.54,-12.7) 12(0,-12.7) 13(-2.54,-15.24) 14(0,-15.24) 15(-2.54,-17.78) 16(0,-17.78) 17(-2.54,-20.32) 18(0,-20.32) 19(-2.54,-22.86) 20(0,-22.86)
CONN_3
  rect 2x3 smd: (-5.735,0.9) (1.975,0.9)
  rect 0.7x1.8 smd: 1(-3.125,4) 2(-1.875,4) 3(-0.625,4)
CONN_4
  rect 2x3 smd: (-5.735,0.9) (3.225,0.9)
  rect 0.7x1.8 smd: 1(-3.125,4) 2(-1.875,4) 3(-0.625,4) 4(0.625,4)
CONN_5_USB_MINI_B
  round 0.9 hole 0.9 unplated: (-2.2,2.62) (2.2,2.62)
  rect 2.057x3.988 smd: (4.925,4.249) 7(-4.925,4.249)
  rect 0.508x2.261 smd: 1(1.6,0.02) 2(0.8,0.02) 3(0,0.02) 4(-0.8,0.02) 5(-1.6,0.02)
  rect 2.057x3.505 smd: 6(-4.925,0) 8(4.925,0)
CONN_6
  rect 0.7x1.8 smd: 1(-3.125,4) 2(-1.875,4) 3(-0.625,4) 4(0.625,4) 5(1.875,4) 6(3.125,4)
  rect 2x3 smd: 7(-5.735,0.9) 8(5.725,0.9)
CONN_PWRJACK
  oval 1.778x4.572 hole 1.016x3.556: 1(0,0)
  oval 1.778x3.81 hole 1.016x3.048: 2(5.994,0)
  oval 3.81x1.778 hole 3.048x1.016: 3(2.997,4.699)
D_0603
  rect 0.95x1 smd: 1(-0.75,0) 2(0.75,0)
DO-214AB_SMC
  rect 1.92x3.48 smd: 1(-3.405,0) 2(3.405,0)
DO-219AB
  rect 1.3x1.4 smd: 1(-1.45,0) 2(1.45,0)
DT1608A
  rect 1.4x3.56 smd: 1(-2.73,0) 2(2.73,0)
FILTER_1210
  rect 1.4x1.94 smd: 1(-1.8,0) 3(1.8,0)
  rect 0.6x1.94 smd: 2(0,0)
FLTR_0603
  rect 0.95x1 smd: 1(-0.75,0) 2(0.75,0)
FLTR_0805
  rect 1.346x1.524 smd: 1(-1,0) 2(1,0)
HDR_1X6_MOLEX
  rect 3.55x0.85 smd: (-3.9,3.75) (-3.9,2.25) (-3.9,0.75) (-3.9,-0.75) (-3.9,-2.25) (-3.9,-3.75)
  rect 2.65x0.85 smd: 1(0,3.75) 2(0,2.25) 3(0,0.75) 4(0,-0.75) 5(0,-2.25) 6(0,-3.75)
HDR_1X9_MOLEX
  rect 3.55x0.85 smd: (-3.9,-6) (-3.9,-4.5) (-3.9,-3) (-3.9,-1.5) (-3.9,0) (-3.9,1.5) (-3.9,3) (-3.9,4.5) (-3.9,6)
  rect 2.65x0.85 smd: 1(0,6) 2(0,4.5) 3(0,3) 4(0,1.5) 5(0,0) 6(0,-1.5) 7(0,-3) 8(0,-4.5) 9(0,-6)
MSS1048
  rect 3.56x1.78 smd: 1(0,4.7) 2(0,-4.7)
QFN_40
  rect 0.85x0.28 smd: 1(-3,2.25) 2(-3,1.75) 3(-3,1.25) 4(-3,0.75) 5(-3,0.25) 6(-3,-0.25) 7(-3,-0.75) 8(-3,-1.25) 9(-3,-1.75) 10(-3,-2.25) 21(3,-2.25) 22(3,-1.75) 23(3,-1.25) 24(3,-0.75) 25(3,-0.25) 26(3,0.25) 27(3,0.75) 28(3,1.25) 29(3,1.75) 30(3,2.25)
  rect 0.28x0.85 smd: 11(-2.25,-3) 12(-1.75,-3) 13(-1.25,-3) 14(-0.75,-3) 15(-0.25,-3) 16(0.25,-3) 17(0.75,-3) 18(1.25,-3) 19(1.75,-3) 20(2.25,-3) 31(2.25,3) 32(1.75,3) 33(1.25,3) 34(0.75,3) 35(0.25,3) 36(-0.25,3) 37(-0.75,3) 38(-1.25,3) 39(-1.75,3) 40(-2.25,3)
  rect 3.52x2.62 smd: 41(0,0)
RES_0201
  rect 0.559x0.508 smd: 1(-0.401,0) 2(0.401,0)
RES_0402
  rect 0.65x0.65 smd: 1(-0.47,0) 2(0.47,0)
RES_0603
  rect 0.95x1 smd: 1(-0.75,0) 2(0.75,0)
RES_1206
  rect 1.6x1.8 smd: 1(-1.4,0) 2(1.4,0)
RGT
  rect 0.8x0.23 smd: 1(-1.475,0.75) 2(-1.475,0.25) 3(-1.475,-0.25) 4(-1.475,-0.75) 9(1.475,-0.75) 10(1.475,-0.25) 11(1.475,0.25) 12(1.475,0.75)
  rect 0.23x0.8 smd: 5(-0.75,-1.475) 6(-0.25,-1.475) 7(0.25,-1.475) 8(0.75,-1.475) 13(0.75,1.475) 14(0.25,1.475) 15(-0.25,1.475) 16(-0.75,1.475)
  rect 1.7x1.7 smd: 17(0,0)
RGY
  rect 0.85x0.28 smd: 1(-1.725,-0.75) 7(1.725,-0.75) 8(1.725,0.75) 14(-1.725,0.75)
  rect 0.28x0.85 smd: 2(-1,-1.725) 3(-0.5,-1.725) 4(0,-1.725) 5(0.5,-1.725) 6(1,-1.725) 9(1,1.725) 10(0.5,1.725) 11(0,1.725) 12(-0.5,1.725) 13(-1,1.725)
  custom 4.3x2.05 smd: 15(0,0)
RPACK_16
  rect 0.45x0.8 smd: 1(0,0) 8(3.65,0) 9(3.65,1.6) 16(0,1.6)
  rect 0.3x0.8 smd: 2(0.575,0) 3(1.075,0) 4(1.575,0) 5(2.075,0) 6(2.575,0) 7(3.075,0) 10(3.075,1.6) 11(2.575,1.6) 12(2.075,1.6) 13(1.575,1.6) 14(1.075,1.6) 15(0.575,1.6)
RSE
  rect 0.3x0.575 smd: 1(-0.75,-0.637) 4(0.75,-0.637) 6(0.75,0.638) 9(-0.75,0.638)
  rect 0.25x0.575 smd: 2(-0.25,-0.637) 3(0.25,-0.637) 7(0.25,0.638) 8(-0.25,0.638)
  rect 0.63x0.35 smd: 5(0.86,0) 10(-0.86,0)
SC-90_SOD-323F
  rect 0.9x0.65 smd: 1(-1.225,0) 2(1.225,0)
SOD_123
  rect 0.8x0.65 smd: 1(-1.75,0) 2(1.75,0)
SOIC24-PWP_TI
  rect 1.5x0.3 smd: 1(-3.2,3.575) 2(-3.2,2.925) 3(-3.2,2.275) 4(-3.2,1.625) 5(-3.2,0.975) 6(-3.2,0.325) 7(-3.2,-0.325) 8(-3.2,-0.975) 9(-3.2,-1.625) 10(-3.2,-2.275) 11(-3.2,-2.925) 12(-3.2,-3.575) 13(3.2,-3.575) 14(3.2,-2.925) 15(3.2,-2.275) 16(3.2,-1.625) 17(3.2,-0.975) 18(3.2,-0.325) 19(3.2,0.325) 20(3.2,0.975) 21(3.2,1.625) 22(3.2,2.275) 23(3.2,2.925) 24(3.2,3.575)
  rect 2.4x5.16 smd: 25(0,0)
SOP_4
  rect 1.05x1.05 smd: 1(-1.15,0.76)
  rect 1.1x0.55 smd: 2(-1.15,-0.96) 3(1.15,-0.96) 4(1.15,0.96)
SOT23-3_FC
  rect 1x1.4 smd: 1(0.95,-1.1) 2(-0.95,-1.1) 3(0,1.1)
SOT23-5
  rect 0.69x1.3 smd: 1(-0.95,-1.3) 2(0,-1.3) 3(0.95,-1.3) 4(0.95,1.3) 5(-0.95,1.3)
SOT23-DBV_TI
  rect 1.3x0.65 smd: 1(-1.4,0.95) 2(-1.4,0) 3(-1.4,-0.95) 4(1.4,-0.95) 5(1.4,0.95)
SOT23AVXD
  rect 1x1.4 smd: 1(0.95,-1.1) 2(-0.95,-1.1) 3(0,1.1)
SOT323
  rect 0.8x0.9 smd: 1(-0.65,-0.95) 2(0,0.95) 3(0.65,-0.95)
SOT323AVX
  rect 1x1.4 smd: 1(-0.95,-1.1) 2(0.95,-1.1) 3(0,1.1)
SPT23AVXD
  rect 1x1.4 smd: 1(-0.95,-1.1) 2(0,1.1) 3(0.95,-1.1)
SRR1005
  rect 1.92x2.79 smd: 1(-2.2,0) 2(2.2,0)
SW_GT12
  rect 2.2x1.3 smd: (3.5,1.65) (3.5,-1.65) 1(-3.5,1.65) 3(-3.5,-1.65)
TI_DBV
  rect 1.1x0.55 smd: 1(-1.25,0.95) 2(-1.25,0) 3(-1.25,-0.95) 4(1.25,-0.95) 5(1.25,0.95)
TI_DCK
  rect 1x0.38 smd: 1(-1,0.65) 2(-1,0) 3(-1,-0.65) 4(1,-0.65) 5(1,0.65)
TI_DVB
  rect 1.3x0.65 smd: 1(-1.4,0.95) 2(-1.4,0) 3(-1.4,-0.95) 4(1.4,-0.95) 5(1.4,0.95)
TP
  round 0.762 smd: 1(0,0)
TP40
  round 1.016 smd: 1(0,0)
TP40_24
  round 1.016 hole 0.61: 1(0,0)
TSOP-56
  round 1.27 hole 1.27: (-5.08,4.75) (5.08,4.75)
  rect 1.74x0.3 smd: 1(-9.67,6.75) 2(-9.67,6.25) 3(-9.67,5.75) 4(-9.67,5.25) 5(-9.67,4.75) 6(-9.67,4.25) 7(-9.67,3.75) 8(-9.67,3.25) 9(-9.67,2.75) 10(-9.67,2.25) 11(-9.67,1.75) 12(-9.67,1.25) 13(-9.67,0.75) 14(-9.67,0.25) 15(-9.67,-0.25) 16(-9.67,-0.75) 17(-9.67,-1.25) 18(-9.67,-1.75) 19(-9.67,-2.25) 20(-9.67,-2.75) 21(-9.67,-3.25) 22(-9.67,-3.75) 23(-9.67,-4.25) 24(-9.67,-4.75) 25(-9.67,-5.25) 26(-9.67,-5.75) 27(-9.67,-6.25) 28(-9.67,-6.75) 29(9.67,-6.75) 30(9.67,-6.25) 31(9.67,-5.75) 32(9.67,-5.25) 33(9.67,-4.75) 34(9.67,-4.25) 35(9.67,-3.75) 36(9.67,-3.25) 37(9.67,-2.75) 38(9.67,-2.25) 39(9.67,-1.75) 40(9.67,-1.25) 41(9.67,-0.75) 42(9.67,-0.25) 43(9.67,0.25) 44(9.67,0.75) 45(9.67,1.25) 46(9.67,1.75) 47(9.67,2.25) 48(9.67,2.75) 49(9.67,3.25) 50(9.67,3.75) 51(9.67,4.25) 52(9.67,4.75) 53(9.67,5.25) 54(9.67,5.75) 55(9.67,6.25) 56(9.67,6.75)
U_6_SON
  rect 0.4x0.46 smd: 1(-0.65,-0.92) 2(0,-0.92) 3(0.65,-0.92) 4(0.65,0.92) 5(0,0.92) 6(-0.65,0.92)
  rect 1.05x1.1 smd: D(-0.325,0)
  rect 0.4x0.85 smd: S(0.65,0.125)
unnamed
  round 1 smd: (0,0)
XFL4020
  rect 3.7x1.45 smd: 1(0,1.225) 2(0,-1.225)

## Nets
